# Altium PCB OFDMT1.PcbDoc (part 3 of 4)
Units mm, origin at the board's own origin, x right, y up, seen from the top; angles counter-clockwise.
Board outline 40.21 x 28.18 mm, 6 copper layers (Top Layer, GND1, SIGNAL, POWER, GND2, Bottom Layer), stack 1.436 mm thick; 295 components, 218 nets, 1362 pads, 709 vias.
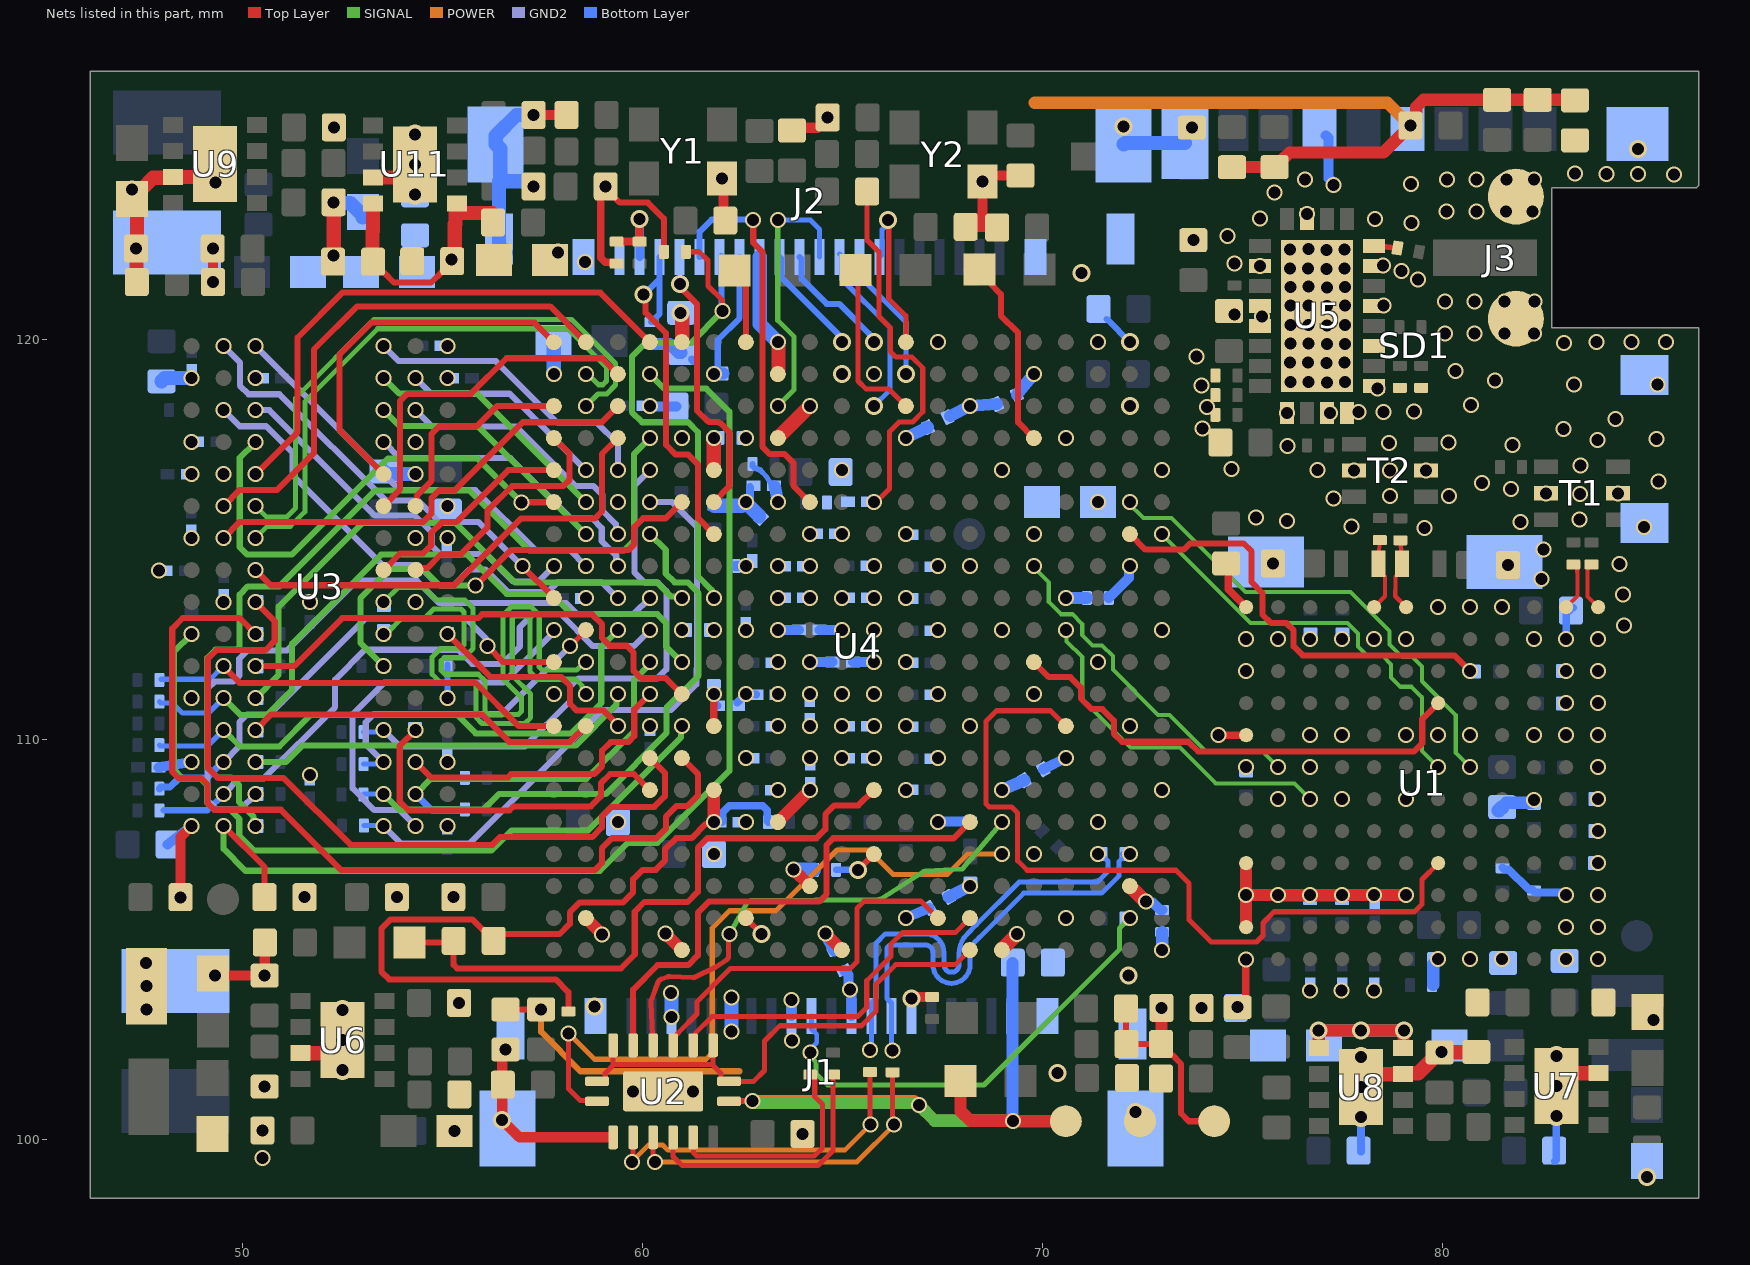
[diagram p6: the nets of this part, all layers, seen from the top]

## Via types
v1: diameter 0.4, hole 0.3, Top Layer to Bottom Layer, tented both sides, 609 vias
v2: diameter 0.45, hole 0.3, Top Layer to Bottom Layer, tented both sides, 85 vias
v3: diameter 0.5, hole 0.3, Top Layer to Bottom Layer, tented both sides, 13 vias
v4: diameter 0.5, hole 0.3, Top Layer to Bottom Layer, 2 vias

## Nets (pads, with @x,y where several pads share a name; then routed paths per layer and width w, separated by ;. In a path a pad name is that pad's centre, name@x,y a point inside that pad or via, vN(x,y) a via of type N, cw(c..) or ccw(c..) an arc to the next point about the centre after c; other vN are vias at no path point) (continued)
+1.8: C3.2 C4.1 C29.1 C34.1 C35.2 C41.1 C43.1 C70.1 C71.1 C72.1 C73.1 C74.1 C75.1 C76.1 C77.1 C83.1 C84.1 C85.1 C86.1 C87.1 FB1.1 FB5.1 R16.1 R25.1 R91.1 R92.1 TP2.1 U1.H12 U4.C19 U4.F8 U4.F11 U4.F18 U4.G9 U4.H8 U4.H14 U4.J9 U4.J11 U4.J17 U4.K8 U4.K20 U4.L11 U4.M8 U4.M16 U4.N9 U4.N11 U4.P10 U4.R9 U4.T8 U4.U11 U4.W7 U4.Y10 U8.4 U8.5 | length 34.8
  Top Layer w0.127: FB5.1@65.618,123.685 65.618,122.474 65.919,122.173 65.919,120.563 66.207,120.275 66.207,119.684 66.344,119.547 66.743,119.547 67.011,119.279 67.011,118.179 66.753,117.921 66.418,117.921 66.178,117.682 66.178,116.254 66.006,116.081 66,116.081 65.843,115.924 v1(65.787,115.924)
  Top Layer w0.152: C43.1@56.578,103.235 56.582,103.238 57.463,103.238 R25.1@57.468,103.243 ; v1(57.468,103.238) R25.1@57.468,103.243 ; R25.1@57.646,103.243 R25.1@57.468,103.243 ; U4.W7@62.587,105.524 v2(62.979,105.131) ; v2(65.392,106.731) U4.U11@65.787,107.124 ; R92.1@71.879,102.101 72.103,102.325 R92.1@72.103,102.375 ; R91.1@72.09,103.264 72.09,102.387 R92.1@72.103,102.375 ; R16.1@72.976,102.381 R16.1@72.97,102.375 ; TP2.1@74.295,100.444 73.664,100.444 73.467,100.642 73.467,101.877 73.243,102.101 73.193,102.101 72.97,102.325 R16.1@72.97,102.375 ; R92.1@72.103,102.375 R16.1@72.97,102.375
  Top Layer w0.191: v1(74.409,110.096) U1.H12@75.095,110.096
  Top Layer w0.305: U4.T8@63.387,107.924 v1(64.187,108.724) ; v1(64.58,105.137) 64.58,105.131 U4.Y10@64.987,104.724 U4.Y10@64.987,104.718 ; R16.1@72.976,102.381 72.976,103.27 v1(72.982,103.276) C4.1@72.982,103.273 ; U8.5@76.915,102.27 76.908,102.277 76.908,102.708 v2(76.902,102.715) v2(77.969,102.715) v2(79.036,102.715) 79.026,102.705 79.026,102.281 U8.4@79.015,102.27
  POWER w0.152: v1(57.468,103.238) 57.468,102.678 58.452,101.693 62.433,101.693
  Bottom Layer w0.127: 62.951,116.715 63.096,116.57 C71.1@63.243,116.327
  Bottom Layer w0.152: FB1.1@62.755,116.878 62.755,116.828 62.804,116.779 62.951,116.715 ; C71.1@63.243,116.327 C71.1@63.289,116.327 ; C29.1@64.842,106.731 v2(65.392,106.731) ; v1(70.587,113.524) v1@70.588,113.525
  Bottom Layer w0.254: v1@63.387,112.725 C85.1@63.919,112.725 ; C73.1@65.265,111.925 v1(65.787,111.924)
  Bottom Layer w0.305: C71.1@63.312,116.308 v1(63.387,115.924) ; v1(64.58,105.137) C34.1@64.806,104.719 ; v1@70.588,113.525 C41.1@71.112,113.525 ; v2(76.902,102.715) v2(77.969,102.715) v2(79.036,102.715) 79.04,102.711 v2@79.04,102.729
  other v1: 64.987,109.524 64.187,110.324 65.787,110.324 63.387,111.124 69.787,111.124 63.387,112.724 72.987,112.724 64.187,113.524 65.787,113.524 63.387,114.324 68.187,114.324 64.187,115.124 71.387,115.924
  other v2: 72.187,118.324
+3.3: C13.2 C32.1 C55.1 C56.1 C57.1 C58.1 C59.1 C60.1 C61.1 C62.1 C63.1 C104.2 C105.1 C106.1 C157.1 C158.1 C159.1 D5.2 FB6.1 J1.1 J2.7 R29.1 R33.1 R58.2 R59.2 R60.2 R61.2 R62.2 R65.2 R66.2 R73.1 R74.1 R85.2 R89.2 R90.2 R93.2 SD1.4 TP5.1 U2.16 U4.A13 U4.B6 U4.B10 U4.B16 U4.D7 U4.D12 U4.E15 U4.K6 U4.M6 U4.N6 U4.N19 U4.R6 U4.R15 U4.T6 U4.T18 U4.V14 U4.W17 U4.Y20 U11.4 U11.5 | length 79.9
  Top Layer w0.102: R65.2@59.36,121.886 59.41,121.886 R65.2@59.397,121.874
  Top Layer w0.152: C56.1@53.269,121.932 53.269,121.882 53.493,121.658 53.543,121.658 53.789,121.412 54.721,121.412 54.98,121.671 55.022,121.671 55.232,121.882 55.232,121.958 v2(55.232,121.983) ; R85.2@58.153,103.191 58.153,103.67 57.833,103.99 53.668,103.99 53.475,104.183 53.475,105.261 53.706,105.493 55.743,105.493 56.009,105.227 56.059,105.227 56.283,105.003 R93.2@56.283,104.953 56.455,105.125 57.931,105.125 58.187,105.381 58.187,105.667 58.428,105.908 59.514,105.908 59.771,106.165 59.771,106.493 60.007,106.729 60.336,106.729 60.571,106.964 60.571,107.252 60.844,107.524 61.232,107.524 61.585,107.877 61.74,107.877 v1(61.787,107.924) ; v1(59.085,123.812) 59.085,123.762 59.437,123.411 60.138,123.411 60.54,123.009 R73.1@60.54,122.18 ; U2.16@62.169,100.942 62.174,100.947 62.746,100.947 v1(62.751,100.952)
  Top Layer w0.191: v1(59.085,123.812) 58.96,123.687 58.96,122.033 59.077,121.916 59.33,121.916 R65.2@59.36,121.886 ; U4.N6@61.787,110.324 v1(61.787,111.124)
  Top Layer w0.305: v1(61.787,107.924) U4.R6@61.787,108.724 ; D5.2@67.956,101.448 67.956,100.7 68.201,100.455 v1(69.263,100.455) 69.274,100.444 TP5.1@70.587,100.444 ; U4.V14@68.187,106.324 v1(68.187,106.327) ; R61.2@74.741,124.294 74.745,124.298 R60.2@75.806,124.298 75.856,124.298 76.004,124.446 76.004,124.485 76.182,124.663 78.527,124.663 79.003,125.139 79.053,125.139 79.2,125.286 v1(79.2,125.336) ; R59.2@79.2,125.386 v1(79.2,125.336) ; C63.1@83.261,125.963 83.244,125.981 R58.2@81.369,125.981 79.527,125.981 79.348,125.802 79.348,125.484 v1(79.2,125.336)
  Top Layer w0.356: C56.1@53.256,122.238 53.256,122.687 53.264,122.695 U11.4@53.264,123.391 ; C62.1@55.232,121.958 C62.1@55.246,121.945 55.311,122.011 55.311,122.867 55.328,122.867 55.328,123.369 55.35,123.391 U11.5@55.364,123.391 ; 55.364,123.147 56.24,123.147 R29.1@56.274,123.114
  SIGNAL w0.305: v1(62.751,100.952) 62.776,100.952 62.826,100.903 66.838,100.903 66.891,100.851 v1(66.916,100.851) 67.312,100.455 v1(69.263,100.455)
  POWER w0.305: v1(62.751,100.952) 66.789,100.952 66.891,100.851 v1(66.916,100.851) 67.312,100.455 v1(69.263,100.455) ; 69.812,125.908 78.629,125.908 v1(79.2,125.336)
  Bottom Layer w0.152: C55.1@61.239,119.516 61.213,119.49 C55.1@61.264,119.429 ; v1@61.809,119.146 61.809,119.213 61.885,119.29 61.885,119.975 62.434,120.524 J2.7@62.434,122.047
  Bottom Layer w0.191: v1(61.787,111.124) 61.827,111.084 61.827,110.865 61.863,110.829 C106.1@61.887,110.829 ; C105.1@61.833,107.971 v1(61.787,107.924) 62.001,107.924 C105.1@62.001,107.955 ; C105.1@61.925,107.925 C105.1@61.971,107.925 ; C105.1@62.007,107.961 62.007,108.163 62.171,108.327 63.012,108.327 63.123,108.216 63.123,107.945 R89.2@63.144,107.924
  Bottom Layer w0.305: R74.1@60.223,119.871 60.685,119.871 60.901,119.655 C55.1@60.973,119.655 ; v1(61.787,119.124) v1@61.793,119.13 ; v1@61.799,119.136 R66.2@62.025,119.136 ; v1(66.587,117.524) C59.1@67.141,117.795 ; C158.1@67.659,106.053 v1(68.187,106.327) ; v1(68.987,108.724) C159.1@69.548,108.968 ; C57.1@69.257,104.403 69.257,103.504 69.255,103.502 69.255,103.104 69.257,103.106 69.257,100.461 v1(69.263,100.455) ; C60.1@69.363,118.607 v1(69.787,119.124) ; v1@72.996,104.734 C157.1@72.996,105.173
  other v1: 72.987,104.724 70.587,105.524 71.387,107.924 72.187,110.324 61.787,112.724 68.987,116.724 62.587,117.524 67.387,119.924
  other v2: 64.987,119.124
AD9361_RESET: R7.1 U1.K5 U4.G19 | length 11
  Top Layer w0.152: U4.G19@72.196,115.115 72.578,114.733 73.54,114.733 73.698,114.892 75.029,114.892 75.232,114.689 75.232,113.922 75.503,113.65 75.503,113.113 75.72,112.896 76.101,112.896 76.282,112.715 76.282,112.317 76.51,112.089 80.303,112.089 v1(80.695,111.696)
AD9361_RX1A_N: C10.2 U1.M2 | length 1.2
  Top Layer w0.102: U1.M2@83.095,113.296 83.374,113.575 83.374,114.179 83.373,114.239 C10.2@83.274,114.338
AD9361_RX1A_P: C9.2 U1.M1 | length 1.2
  Top Layer w0.102: C9.2@83.731,114.338 83.632,114.239 83.632,114.184 83.628,114.179 83.628,113.564 U1.M1@83.895,113.296
AD9361_TX1A_N: C23.2 L4.2 U1.M8 | length 1.9
  Top Layer w0.104: U1.M8@78.295,113.296 78.567,113.568 78.567,113.816 78.57,113.819 78.57,114.066 78.406,114.23 L4.2@78.406,114.383 78.411,114.469 78.421,114.661 78.421,114.663 78.433,114.895 78.433,114.897 C23.2@78.436,114.97
AD9361_TX1A_P: C24.2 L1.2 U1.M7 | length 1.9
  Top Layer w0.104: C24.2@78.954,114.969 78.959,114.896 78.959,114.893 78.973,114.664 78.973,114.661 78.984,114.476 L1.2@78.99,114.383 78.99,114.23 78.826,114.066 78.826,113.713 78.823,113.71 78.823,113.568 U1.M7@79.095,113.296
ANT: C33.2 U5.12 | length 0.6
  Top Layer w0.14: U5.12@78.294,122.328 78.499,122.308 U5.12@78.515,122.308 ; C33.2@78.822,122.28 C33.2@78.877,122.275
  Top Layer w0.152: U5.12@78.515,122.308 C33.2@78.822,122.28
bootmode: J2.2 R37.2 R65.1 | length 2.1
  Top Layer w0.203: R65.1@59.36,122.436 59.927,122.436 R37.2@59.931,122.432 v2(59.931,122.999)
  Bottom Layer w0.203: v2(59.931,122.999) 59.934,122.997 J2.2@59.934,122.047
CLK_IN_9361: C146.2 U1.M12 | length 1.2
  Top Layer w0.191: C146.2@74.652,114.325 74.652,113.74 U1.M12@75.095,113.296
CLK_OUT_9361: U1.J6 U4.L16 | length 12.2
  Top Layer w0.152: U4.L16@69.787,111.924 70.165,111.546 70.699,111.546 70.965,111.281 70.965,111.012 71.23,110.746 71.499,110.746 71.789,110.457 71.789,110.133 71.992,109.93 73.651,109.93 73.892,109.69 79.294,109.69 79.498,109.894 79.498,110.499 U1.J6@79.895,110.896
CTRL_IN2: U1.D6 U4.N17 | length 19.7
  Top Layer w0.127: U4.N17@70.587,110.324 70.204,110.707 68.853,110.707 68.593,110.447 68.593,108.378 68.668,108.304 69.231,108.304 69.384,108.151 69.384,106.955 69.621,106.718 73.34,106.718 73.671,106.387 73.671,105.475 74.221,104.925 75.355,104.925 75.516,105.086 75.516,105.402 75.794,105.681 79.303,105.681 79.489,105.866 79.489,106.49 U1.D6@79.895,106.896
DATA_CLK_P: U1.G11 U4.H16 | length 8.9
  SIGNAL w0.102: v1(69.787,114.324) 69.787,114.282 70.161,113.908 70.161,113.429 70.47,113.119 70.757,113.119 70.997,112.878 70.997,112.6 71.259,112.339 71.495,112.339 71.762,112.072 71.762,111.737 72.895,110.604 73.177,110.604 74.092,109.69 75.502,109.69 v1(75.895,109.296)
DDR_A0: R21.1 U3.N3 U4.N2 | length 8.9
  Top Layer w0.152: v1(50.33,110.224) 50.723,110.617 55.981,110.617 56.671,109.927 58.19,109.927 U4.N2@58.587,110.324
DDR_A1: R79.1 U3.P7 U4.K2 | length 8.2
  Top Layer w0.127: v1(58.192,112.319) 58.587,112.714 U4.K2@58.587,112.724
  GND2 w0.152: v1(53.53,109.424) 53.086,109.869 53.086,110.42 53.284,110.618 56.491,110.618 v1(58.192,112.319)
  Bottom Layer w0.127: R79.1@53.032,109.371 53.403,109.371 53.457,109.424 v1(53.53,109.424)
DDR_A2: R41.1 U3.P3 U4.M3 | length 9.9
  SIGNAL w0.152: v1(50.33,109.424) 51.091,109.424 51.501,109.834 58.33,109.834 59.352,110.857 59.352,111.09 v1(59.387,111.124)
DDR_A3: R45.1 U3.N2 U4.K3 | length 14.2
  SIGNAL w0.152: v1(49.531,110.224) 49.942,109.813 50.926,109.813 51.715,110.602 55.37,110.602 55.831,110.141 58.219,110.141 58.974,110.896 58.974,112.306 v1@59.38,112.713
  Bottom Layer w0.127: R45.1@47.925,109.845 47.946,109.824 49.131,109.824 v1(49.531,110.224)
  other v1: 59.387,112.724
DDR_A4: R48.1 U3.P8 U4.M4 | length 8.9
  Top Layer w0.152: v1(54.33,109.424) 54.713,109.042 56.642,109.042 56.723,109.123 58.795,109.123 58.996,109.324 58.996,109.712 59.208,109.924 59.647,109.924 59.798,110.075 59.798,110.735 v1(60.187,111.124)
  Bottom Layer w0.127: v1(54.33,109.424) 54.725,109.029 R48.1@55.562,109.029
DDR_A5: R52.1 U3.P2 U4.L1 | length 12.5
  Top Layer w0.152: v1(56.134,112.319) 56.134,112.315 56.524,111.924 U4.L1@57.787,111.924
  GND2 w0.152: v1(49.531,109.424) 49.924,109.818 49.924,110.423 50.117,110.616 50.686,110.616 53.083,113.013 55.588,113.013 56.086,112.515 56.086,112.366 v1(56.134,112.319)
  Bottom Layer w0.178: R52.1@47.925,108.757 47.925,108.76 47.962,108.796 48.189,108.796 48.413,109.02 49.103,109.02 49.508,109.424 v1(49.531,109.424)
DDR_A6: R55.1 U3.R8 U4.L4 | length 9.4
  SIGNAL w0.152: v1(54.33,108.624) 54.708,109.002 58.599,109.002 59.792,110.195 59.792,111.469 60.187,111.864 v1(60.187,111.924)
  Bottom Layer w0.178: v1(54.33,108.624) 54.732,108.222 55.543,108.222 R55.1@55.562,108.242
DDR_A7: R31.1 U3.R2 U4.K4 | length 15.7
  GND2 w0.152: v1(49.531,108.624) 49.924,109.017 50.54,109.017 52.318,110.795 52.318,111.483 53.066,112.231 55.393,112.231 55.746,111.878 56.501,111.878 56.934,112.312 56.934,112.789 57.272,113.127 57.954,113.127 58.751,112.33 59.793,112.33 v1(60.187,112.724)
  Bottom Layer w0.152: R31.1@48.035,108.219 49.126,108.219 v1(49.531,108.624)
DDR_A8: R38.1 U3.T8 U4.K1 | length 9.8
  GND2 w0.152: v1(54.331,107.824) 53.934,108.221 53.302,108.221 52.756,108.767 52.756,110.62 53.544,111.408 56.525,111.408 57.787,112.67 v1(57.787,112.724)
DDR_A9: R42.1 U3.R3 U4.J4 | length 17.2
  GND2 w0.152: v1(50.33,108.624) 49.946,108.24 49.353,108.24 49.127,108.466 49.127,109.824 49.127,111.251 49.31,111.435 49.773,111.435 49.922,111.583 49.922,112.006 50.125,112.209 51.11,112.209 52.859,113.958 54.364,113.958 54.926,113.396 58.092,113.396 58.361,113.127 59.79,113.127 v1(60.187,113.524)
DDR_A10: R46.1 U3.L7 U4.F5 | length 11.6
  Top Layer w0.152: v1(55.834,113.833) 56.727,114.726 59.657,114.726 59.795,114.864 59.795,115.296 60.019,115.52 60.582,115.52 U4.F5@60.987,115.924
  SIGNAL w0.152: v1(53.53,111.824) 52.951,112.403 52.951,113.518 53.681,114.247 54.519,114.247 54.932,113.833 v1(55.834,113.833)
DDR_A11: R49.1 U3.R7 U4.G4 | length 14.5
  SIGNAL w0.152: v1(53.53,108.624) 53.924,108.231 56.021,108.231 56.413,108.623 59.08,108.623 60.603,110.145 60.603,110.779 61.407,111.584 61.407,113.643 61.136,113.913 60.808,113.913 60.585,114.136 60.585,114.726 v1(60.187,115.124)
  Bottom Layer w0.127: R49.1@53.031,108.61 53.045,108.624 v1(53.53,108.624)
DDR_A12: R53.1 U3.N7 U4.E4 | length 14.4
  GND2 w0.152: v1(53.53,110.224) 53.938,109.816 57.061,109.816 58.191,110.947 58.191,111.305 58.404,111.517 60.372,111.517 60.6,111.745 60.6,113.694 60.386,113.908 60.057,113.908 59.799,114.166 59.799,116.337 v1(60.187,116.724)
  Bottom Layer w0.127: R53.1@53.032,110.171 53.403,110.171 53.457,110.224 v1(53.53,110.224)
DDR_A13: R56.1 U3.T3 U4.D4 | length 21.5
  SIGNAL w0.152: v1(50.33,107.824) 50.283,107.871 50.283,108.059 49.912,108.431 49.912,108.853 49.727,109.037 49.383,109.037 49.123,109.297 49.123,112.025 49.331,112.233 49.859,112.233 49.933,112.308 49.933,113.609 50.139,113.815 50.927,113.815 53.327,116.215 55.667,116.215 57.167,114.715 59.544,114.715 59.787,114.958 59.787,117.124 v1(60.187,117.524)
DDR_A14: R35.1 U3.T7 U4.F4 | length 15.5
  GND2 w0.152: v1(53.53,107.824) 53.969,107.386 55.667,107.386 59.011,110.73 60.717,110.73 61.354,111.366 61.354,111.757 61.365,111.768 61.365,115.305 60.745,115.924 v1(60.187,115.924)
  Bottom Layer w0.127: R35.1@53.039,107.836 53.519,107.836 v1(53.53,107.824)
DDR_BA0: R39.1 U3.M2 U4.L5 | length 17.3
  SIGNAL w0.152: v1(49.531,111.024) 49.95,110.604 50.618,110.604 51.244,111.231 51.244,112.382 53.47,114.608 55.626,114.608 56.609,113.626 57.736,113.626 58.241,113.121 60.374,113.121 60.588,112.906 60.588,112.323 v1(60.987,111.924)
  Bottom Layer w0.127: R39.1@47.925,110.933 47.957,110.901 48.248,110.901 48.501,110.648 49.155,110.648 v1(49.531,111.024)
DDR_BA1: R43.1 U3.N8 U4.R4 | length 9
  Top Layer w0.152: v1(54.33,110.224) 53.934,109.828 53.934,108.436 54.158,108.213 56.676,108.213 56.78,108.317 58.714,108.317 58.965,108.568 58.965,108.897 59.193,109.125 59.786,109.125 U4.R4@60.187,108.724
DDR_BA2: R47.1 U3.M3 U4.J5 | length 14.2
  SIGNAL w0.152: v1(50.33,111.024) 50.909,111.602 50.909,112.22 50.909,113.306 53.01,115.407 55.323,115.407 56.819,113.911 60.37,113.911 60.723,113.558 60.953,113.558 v1(60.987,113.524)
DDR_CAS: R36.1 U3.K3 U4.P5 | length 22.6
  Top Layer w0.152: v1(50.33,112.624) 49.93,113.025 48.511,113.025 48.247,112.761 48.247,109.185 48.413,109.019 48.971,109.019 49.131,108.859 49.131,108.394 49.295,108.23 50.964,108.23 52.474,106.72 58.807,106.72 58.987,106.9 58.987,107.267 59.238,107.518 60.345,107.518 60.587,107.76 60.587,108.058 60.85,108.322 61.119,108.322 61.396,108.599 61.396,109.115 U4.P5@60.996,109.515
DDR_CKE: R44.1 U3.K9 U4.N3 | length 5.5
  Top Layer w0.152: v1(55.13,112.624) 56.209,111.546 57.974,111.546 58.191,111.328 58.191,110.876 58.358,110.709 59.036,110.709 59.387,110.358 v1(59.387,110.324)
DDR_CKN: R51.2 U3.K7 U4.M2 | length 14.2
  SIGNAL w0.127: v1(53.53,112.624) 53.594,112.624 54.001,113.031 54.567,113.031 54.785,113.249 55.466,113.249 55.54,113.174 55.54,112.353 55.446,112.259 54.953,112.259 54.745,112.051 54.745,111.617 54.973,111.389 55.806,111.389 55.837,111.358 55.837,110.546 55.994,110.388 57.064,110.388 57.209,110.533 57.209,111.123 56.748,111.583 56.748,113.004 56.823,113.078 57.119,113.078 57.193,113.004 57.193,111.683 57.383,111.493 58.334,111.493 58.496,111.331 58.496,111.289 58.587,111.198 v1(58.587,111.124)
DDR_CKP: R51.1 U3.J7 U4.L2 | length 14
  SIGNAL w0.127: v1@53.538,113.431 53.896,113.789 54.536,113.789 54.848,113.477 55.56,113.477 55.769,113.269 55.769,112.259 55.54,112.03 55.048,112.03 54.974,111.956 54.974,111.712 55.068,111.618 55.9,111.618 56.065,111.453 56.065,110.691 56.14,110.617 56.906,110.617 56.98,110.691 56.98,111.028 56.52,111.489 56.52,113.099 56.728,113.307 57.217,113.307 57.422,113.102 57.422,111.796 57.496,111.722 58.352,111.722 58.555,111.924 v1(58.587,111.924)
  other v1: 53.53,113.424
DDR_CS: R54.1 U3.L2 U4.N1 | length 10.6
  Top Layer w0.152: v1(49.531,111.824) 49.531,111.807 49.933,111.404 55.829,111.404 56.909,110.324 U4.N1@57.787,110.324
  Bottom Layer w0.127: R54.1@47.968,111.493 49.2,111.493 v1(49.531,111.824)
DDR_DM0: U3.E7 U4.A1 | length 9.3
  Top Layer w0.152: U3.E7@53.53,116.624 52.426,117.729 52.426,119.609 53.226,120.409 57.302,120.409 U4.A1@57.787,119.924
DDR_DM1: U3.D3 U4.F1 | length 12.1
  Top Layer w0.152: v1(56.974,115.918) 57.781,115.918 U4.F1@57.787,115.924
  SIGNAL w0.152: v1@50.305,117.399 49.936,117.03 49.936,114.796 50.114,114.617 51.244,114.617 53.637,117.01 55.882,117.01 v1(56.974,115.918)
  other v1: 50.33,117.424
DDR_DQ0: U3.E3 U4.A4 | length 13.6
  Top Layer w0.152: v1(50.33,116.624) 51.38,117.673 51.38,120.037 52.5,121.158 58.953,121.158 U4.A4@60.187,119.924
DDR_DQ1: U3.F7 U4.B3 | length 8.8
  Top Layer w0.152: U3.F7@53.53,115.824 53.94,116.234 53.94,118.439 54.127,118.626 55.711,118.626 56.604,119.52 58.991,119.52 U4.B3@59.387,119.124
DDR_DQ2: U3.F2 U4.A2 | length 13
  Top Layer w0.152: v1(49.531,115.824) 49.933,116.226 50.868,116.226 51.791,117.149 51.791,119.737 52.868,120.815 57.696,120.815 U4.A2@58.587,119.924
DDR_DQ3: U3.F8 U4.C1 | length 5.3
  Top Layer w0.152: U3.F8@54.33,115.824 54.367,115.861 54.367,116.089 54.724,116.446 54.724,117.62 54.927,117.823 55.863,117.823 56.364,118.324 U4.C1@57.787,118.324
DDR_DQ4: U3.H3 U4.D3 | length 11.6
  Top Layer w0.152: v1(50.33,114.224) 50.712,113.843 55.296,113.843 56.965,115.512 58.815,115.512 58.991,115.688 58.991,117.129 U4.D3@59.387,117.524
DDR_DQ5: U3.H8 U4.D1 | length 6.2
  Top Layer w0.152: U3.H8@54.33,114.224 54.378,114.271 54.621,114.271 54.966,114.616 55.46,114.616 56.127,115.283 56.127,115.71 56.742,116.325 58.025,116.325 58.18,116.481 58.18,117.131 U4.D1@57.787,117.524
DDR_DQ6: U3.G2 U4.C3 | length 11.4
  Top Layer w0.152: v1(49.531,115.024) 49.927,115.421 54.511,115.421 54.734,115.643 54.734,116.026 54.927,116.219 55.31,116.219 57.01,117.919 58.982,117.919 U4.C3@59.387,118.324
DDR_DQ7: U3.H7 U4.E1 | length 5.5
  Top Layer w0.152: U3.H7@53.53,114.224 53.944,114.638 54.515,114.638 54.723,114.846 54.723,115.151 54.996,115.424 55.343,115.424 56.643,116.724 U4.E1@57.787,116.724
DDR_DQ8: U3.B8 U4.E2 | length 5.2
  GND2 w0.152: v1(54.33,119.024) 54.724,118.631 56.68,118.631 v1(58.587,116.724)
DDR_DQ9: U3.A7 U4.E3 | length 7.5
  GND2 w0.152: v1(53.53,119.824) 53.909,119.445 56.34,119.445 57.876,117.909 58.865,117.909 59.387,117.388 v1(59.387,116.724)
DDR_DQ10: U3.C8 U4.G3 | length 6.7
  GND2 w0.152: v1(54.33,118.224) 54.744,117.811 56.851,117.811 58.338,116.324 58.782,116.324 58.998,116.107 58.998,115.712 59.337,115.373 59.337,115.174 v1(59.387,115.124)
DDR_DQ11: U3.D7 U4.H3 | length 7.5
  GND2 w0.152: v1@53.532,117.426 53.937,117.021 56.704,117.021 58.211,115.515 58.744,115.515 58.985,115.274 58.985,114.947 59.348,114.584 59.348,114.363 v1(59.387,114.324)
  other v1: 53.53,117.424
DDR_DQ12: U3.C2 U4.J3 | length 12.6
  GND2 w0.152: v1(49.531,118.224) 49.936,117.818 50.596,117.818 51.257,117.157 51.257,116.595 53.501,114.351 54.388,114.351 54.892,113.846 55.296,113.846 55.69,114.24 56.078,114.24 56.639,113.679 57.64,113.679 57.872,113.911 58.995,113.911 v1@59.382,113.524
  other v1: 59.387,113.524
DDR_DQ13: U3.A3 U4.H2 | length 10.5
  GND2 w0.152: v1(50.33,119.824) 53.93,116.224 55.823,116.224 57.32,114.727 58.184,114.727 v1(58.587,114.324)
DDR_DQ14: U3.C3 U4.H1 | length 9.6
  GND2 w0.152: v1(50.33,118.224) 50.673,118.224 53.314,115.584 54.317,115.584 54.734,115.166 54.734,114.83 54.939,114.626 56.083,114.626 56.776,113.933 57.396,113.933 v1(57.787,114.324)
DDR_DQ15: U3.A2 U4.J1 | length 11.2
  Top Layer w0.152: v1(57.001,114.324) U4.J1@57.787,113.539
  GND2 w0.152: v1(49.531,119.824) 49.938,119.417 49.938,118.837 50.157,118.618 50.927,118.618 53.581,115.964 54.386,115.964 54.929,115.421 55.905,115.421 v1(57.001,114.324)
DDR_DQS0_N: U3.G3 U4.B2 | length 14
  SIGNAL w0.127: v1(50.33,115.024) 50.623,115.317 51.2,115.317 51.562,115.679 51.562,118.434 53.384,120.256 58.137,120.256 59.102,119.292 59.102,118.948 59.01,118.856 58.905,118.856 58.637,119.124 v1(58.587,119.124)
DDR_DQS0_P: U3.F3 U4.C2 | length 14.7
  SIGNAL w0.127: v1(50.33,115.824) 50.609,115.546 51.105,115.546 51.333,115.774 51.333,118.529 53.289,120.485 58.232,120.485 59.33,119.386 59.33,118.848 59.11,118.628 58.89,118.628 v1(58.587,118.324)
DDR_DQS1_N: U3.B7 U4.F2 | length 6.3
  SIGNAL w0.152: v1(53.53,119.024) 53.92,118.635 55.877,118.635 v1(58.587,115.924)
DDR_DQS1_P: U3.C7 U4.G2 | length 6.3
  SIGNAL w0.152: v1(53.53,118.224) 53.932,117.823 55.888,117.823 v1(58.587,115.124)
DDR_ODT: R50.1 U3.K1 U4.N5 | length 19
  SIGNAL w0.152: v1(48.73,112.624) 48.285,112.179 48.285,109.239 48.503,109.021 48.945,109.021 49.116,108.85 49.116,108.423 49.308,108.231 49.694,108.231 49.922,108.002 49.922,107.582 50.291,107.213 56.231,107.213 56.727,107.709 58.636,107.709 60.97,110.043 60.97,110.271 v1@60.985,110.287
  other v1: 60.987,110.324
DDR_RAS: R57.1 U3.J3 U4.P4 | length 19.7
  Top Layer w0.152: v1(50.33,113.424) 50.81,112.944 50.81,112.455 50.579,112.224 49.354,112.224 49.135,112.006 49.135,109.285 49.396,109.024 51.034,109.024 52.705,107.353 56.248,107.353 56.441,107.546 58.743,107.546 58.987,107.79 58.987,108.058 59.23,108.302 60.299,108.302 60.565,108.568 60.565,109.153 U4.P4@60.206,109.512
DDR_RESET: R76.2 U3.T2 U4.B4 | length 28
  Top Layer w0.152: v1(49.531,107.824) 50.554,106.801 R76.2@50.554,106.045
  SIGNAL w0.152: v1(49.531,107.824) 49.531,107.253 50.077,106.707 58.942,106.707 59.639,107.404 60.376,107.404 62.177,109.205 62.177,118.182 61.6,118.759 60.552,118.759 v1(60.187,119.124)
DDR_WE: R40.1 U3.L3 U4.M5 | length 12.5
  Top Layer w0.152: v1(50.33,111.824) 51.296,111.824 52.496,113.024 55.898,113.024 55.993,113.119 58.741,113.119 58.994,112.866 58.994,112.521 59.184,112.331 59.611,112.331 59.782,112.16 59.782,111.704 59.966,111.52 60.591,111.52 U4.M5@60.987,111.124
EN_AGC: U1.G5 U4.F19 | length 12.3
  SIGNAL w0.102: v1@72.118,115.93 72.526,115.522 73.225,115.522 75.074,113.674 77.701,113.674 78.68,112.695 78.68,112.362 78.981,112.062 79.244,112.062 79.49,111.816 79.49,111.444 80.335,110.6 80.335,109.657 v1(80.695,109.296)
  other v1: 72.187,115.924
EN_ENSM: U1.G6 U4.G20 | length 10.5
  SIGNAL w0.102: v1@73,115.1 75.204,112.895 77.633,112.895 77.886,112.642 77.886,112.317 78.119,112.084 78.499,112.084 78.721,111.863 78.721,111.538 78.953,111.306 79.227,111.306 79.489,111.043 79.489,109.702 v1(79.895,109.296)
  other v1: 72.987,115.124
FB_CLK_P: U1.F10 U4.K17 | length 8.6
  SIGNAL w0.102: v1(70.587,112.724) 70.601,112.71 70.601,112.443 70.998,112.045 70.998,110.989 72.199,109.788 73.437,109.788 74.336,108.89 76.302,108.89 v1(76.695,108.496)
FPGA_DIR: U2.1 U2.2 U2.7 U2.8 U4.Y14 | length 13
  Top Layer w0.127: U2.8@58.869,101.442 59.015,101.442 59.072,101.499 59.072,101.645 59.269,101.842 U2.7@59.269,102.342 ; 59.269,101.859 61.752,101.859 61.769,101.842 ; U2.2@61.769,102.342 61.769,101.842 ; U4.Y14@68.187,104.724 67.822,104.359 66.334,104.359 65.838,103.863 65.838,103.191 65.479,102.832 63.436,102.832 63.055,102.451 63.055,101.714 62.784,101.442 U2.1@62.169,101.442 62.023,101.442 61.966,101.499 61.966,101.645 61.769,101.842
FPGA_DONE: D1.2 R93.1 U4.R11 | length 15.6
  Top Layer w0.152: D1.2@54.18,104.915 55.245,104.915 R93.1@55.283,104.953 55.283,104.351 55.372,104.262 59.459,104.262 59.809,104.612 59.809,105.681 60.053,105.925 61.132,105.925 61.387,106.18 61.387,107.278 61.628,107.519 64.352,107.519 64.575,107.742 64.575,108.115 64.801,108.341 65.403,108.341 U4.R11@65.787,108.724
FPGA_JTAG_TCK: J2.5 U4.F9 | length 10
  Top Layer w0.152: v1(62.772,122.974) 62.772,122.409 63,122.181 63,117.309 63.185,117.124 63.558,117.124 63.778,116.904 63.778,116.333 U4.F9@64.187,115.924
  Bottom Layer w0.152: J2.5@61.468,122.082 J2.5@61.434,122.047 61.434,122.686 61.735,122.987 62.759,122.987 v1(62.772,122.974)
FPGA_JTAG_TDI: J2.3 R74.2 U4.G6 | length 9.2
  Top Layer w0.152: v2(60.033,121.107) 60.08,121.06 60.08,120.654 60.591,120.143 60.591,117.351 60.835,117.108 61.145,117.108 61.394,116.859 61.394,115.517 U4.G6@61.778,115.133
  Bottom Layer w0.152: v2(60.033,121.107) 60.434,121.508 ; R74.2@60.223,120.421 60.273,120.421 60.322,120.47 60.322,120.52 60.434,120.632 60.434,121.508 ; J2.3@60.434,122.047 60.434,121.508
FPGA_JTAG_TDO: J2.4 U4.F6 | length 6.3
  Top Layer w0.152: v2(60.937,121.374) 60.937,121.302 61.362,120.878 61.362,120.084 61.365,120.081 61.365,118.968 61.365,118.212 61.63,117.946 61.648,117.946 61.671,117.924 61.903,117.924 61.925,117.902 61.943,117.902 62.178,117.667 62.178,116.316 U4.F6@61.787,115.924
FPGA_JTAG_TMS: J2.6 R73.2 U4.J6 | length 13.7
  Top Layer w0.127: R73.2@61.09,122.18 61.421,122.18 61.641,121.96 61.641,121.327 61.989,120.98 61.989,120.71 v1(62.003,120.696)
  SIGNAL w0.152: v1(61.787,113.524) 61.74,113.572 61.74,113.722 61.387,114.075 61.387,117.675 61.143,117.919 59.992,117.919 59.741,118.171 59.741,119.561 60.078,119.898 61.206,119.898 v1(62.003,120.696)
  Bottom Layer w0.152: J2.6@61.966,122.079 61.976,122.069 61.976,120.723 v1(62.003,120.696)
FPGA_MIPI_CLK_LP_N: U2.5 U4.T15 | length 12.2
  Top Layer w0.127: 60.212,103.415 60.256,102.582 60.256,102.579 U2.5@60.269,102.342 ; 60.212,103.416 cw(c60.339,103.421) 60.22,103.466 60.393,103.92 ; 60.393,103.92 cw(c60.512,103.875) 60.469,103.994 60.645,104.056 cw(c60.687,103.936) 60.692,104.063 61.259,104.04 ; 61.26,104.04 ccw(c61.264,104.167) 61.318,104.052 61.816,104.289 ; 61.817,104.289 ccw(c61.761,104.403) 61.83,104.297 62.101,104.474 ; 62.101,104.474 ccw(c62.031,104.58) 62.158,104.572 62.158,105.106 v1(62.181,105.129)
  SIGNAL w0.127: v1(62.181,105.129) 62.613,105.892 cw(c62.723,105.83) 62.722,105.957 65.902,105.981 ; 65.903,105.981 ccw(c65.901,106.108) 65.969,106.001 67.016,106.675 ; 67.016,106.675 cw(c67.084,106.568) 67.077,106.695 67.998,106.753 v1(68.987,107.924)
FPGA_MIPI_CLK_LP_P: U2.6 U4.T14 | length 12.9
  Top Layer w0.152: U2.6@59.769,102.342 59.769,103.736 60.379,104.346 61.143,104.346 61.387,104.59 61.387,105.658 61.663,105.934 64.418,105.934 64.605,106.121 64.605,107.353 64.77,107.518 67.781,107.518 U4.T14@68.187,107.924
FPGA_MIPI_D0_LP_N: U2.4 U4.W13 | length 9.3
  Top Layer w0.127: U2.4@60.769,102.342 cw(c61.214,102.342) 60.899,102.657 61.366,103.124 61.366,103.429 62.205,104.267 65.202,104.267 65.367,104.432 65.367,105.766 65.545,105.943 66.968,105.943 U4.W13@67.387,105.524
FPGA_MIPI_D0_LP_P: U2.3 U4.W14 | length 8.9
  Top Layer w0.127: U2.3@61.269,102.342 61.326,102.399 61.326,102.641 61.745,103.061 65.385,103.061 65.61,103.285 65.61,103.958 66.212,104.561 66.212,104.866 66.505,105.159 67.822,105.159 U4.W14@68.18,105.517
FPGA_OE: R85.1 U2.9 U4.U15 | length 17.8
  Top Layer w0.127: v1(58.153,102.641) 58.153,101.257 58.445,100.965 58.846,100.965 U2.9@58.869,100.942
  POWER w0.127: v1(58.153,102.641) 58.801,101.994 61.594,101.994 61.747,102.148 61.747,105.272 62.182,105.706 63.344,105.706 64.864,107.226 65.659,107.226 66.269,106.617 67.627,106.617 68.135,107.124 v1(68.987,107.124)
GND: C1.2 C2.2 C3.1 C4.2 C5.1 C6.2 C7.1 C8.1 C11.1 C12.2 C13.1 C14.1 C15.1 C16.2 C17.1 C18.2 C20.1 C21.2 C22.2 C25.2 C26.2 C27.1 C28.1 C29.2 C30.1 C31.1 C32.2 C34.2 C35.1 C36.2 C37.2 C38.2 C39.2 C40.2 C41.2 C42.2 C43.2 C44.2 C45.2 C46.2 C47.2 C48.2 C49.2 C50.2 C51.2 C52.2 C53.2 C54.1 C55.2 C56.2 C57.2 C58.2 C59.2 C60.2 C61.2 C62.2 C63.2 C64.2 C65.2 C66.2 C67.2 C68.2 C69.2 C70.2 C71.2 C72.2 C73.2 C74.2 C75.2 C76.2 C77.2 C78.2 C79.2 C80.2 C81.2 C82.2 C83.2 C84.2 C85.2 C86.2 C87.2 C88.1 C89.2 C90.2 C91.2 C92.2 C93.2 C94.2 C95.2 C96.2 C97.2 C98.2 C99.2 C100.1 C101.1 C102.1 C103.1 C104.1 C105.2 C106.2 C109.2 C110.1 C111.2 C112.1 C113.2 C114.1 C115.2 C116.1 C117.2 C118.2 C119.1 C120.2 C121.1 C122.2 C123.1 C124.2 C125.1 C126.2 C127.2 C128.2 C130.2 C131.2 C132.2 C133.2 C134.2 C135.2 C136.2 C137.2 C138.2 C139.2 C140.2 C141.1 C142.1 C143.2 C144.1 C145.1 C147.2 C148.1 C149.2 C150.1 C151.2 C152.2 C153.1 C154.1 C155.1 C156.1 C157.2 C158.2 C159.2 J1.6 J1.9 J1.12 J1.15 J1.18 J1.MP1 J1.MP2 J1.MP3 J1.MP4 J1.MP5 J1.MP6 J2.1 J2.8 J2.MP1 J2.MP2 J2.MP3 J2.MP4 J2.MP5 J2.MP6 J3.2 J3.3 pwr-1.1 R4.2 R6.1 R8.1 R9.2 R12.2 R15.2 R18.2 R22.2 R26.2 R27.1 R28.2 R34.1 R63.1 R64.1 R67.2 R70.2 R71.1 R76.1 R77.1 R82.1 R87.1 R94.1 R95.1 SD1.6 SD1.9 SD1.10 SD1.11 SD1.12 SD1.13 SD1.14 T1.2 T1.5 T2.2 T2.5 TP6.1 U1.A1 U1.A2 U1.A4 U1.A5 U1.A6 U1.A12 U1.B1 U1.B2 U1.B12 U1.C1 U1.C2 U1.C7 U1.C8 U1.C9 U1.C10 U1.C11 U1.C12 U1.D1 U1.D12 U1.E1 U1.F1 U1.F3 U1.F7 U1.F9 U1.F11 U1.G1 U1.G10 U1.G12 U1.H1 U1.H2 U1.H3 U1.H5 U1.H6 U1.H7 U1.H9 U1.H10 U1.J1 U1.J2 U1.K1 U1.K2 U1.K12 U1.L1 U1.L2 U1.L3 U1.L7 U1.L8 U1.L9 U1.L10 U1.L11 U1.L12 U1.M4 U1.M5 U1.M6 U2.10 U2.17 U3.A9 U3.B1 U3.B3 U3.B9 U3.D1 U3.D8 U3.E1 U3.E2 U3.E8 U3.F9 U3.G1 U3.G8 U3.G9 U3.J2 U3.J8 U3.M1 U3.M9 U3.P1 U3.P9 U3.T1 U3.T9 U4.A5 U4.A8 U4.A18 U4.B1 U4.B8 U4.B11 U4.C4 U4.C9 U4.C14 U4.D5 U4.D6 U4.D8 U4.D17 U4.E6 U4.E10 U4.E20 U4.F3 U4.F7 U4.G10 U4.G12 U4.G16 U4.H7 U4.H9 U4.H11 U4.H13 U4.H19 U4.J2 U4.J8 U4.J10 U4.J12 U4.K5 U4.K7 U4.K10 U4.K11 U4.K13 U4.K15 U4.L8 U4.L9 U4.L12 U4.L18 U4.M1 U4.M7 U4.M9 U4.M10 U4.M11 U4.M13 U4.N4 U4.N8 U4.N10 U4.N12 U4.N14 U4.P7 U4.P9 U4.P11 U4.P13 U4.P17 U4.R8 U4.R12 U4.R20 U4.T3 U4.T7 U4.T13 U4.U6 U4.U16 U4.V9 U4.V19 U4.W2 U4.W12 U4.Y5 U4.Y15 U5.1 U5.3 U5.4 U5.5 U5.7 U5.9 U5.11 U5.15 U5.18 U5.20 U5.21 U5.25 U6.3 U6.9 U7.3 U7.9 U8.3 U8.9 U9.3 U9.9 U11.3 U11.9 Y1.2 Y2.2 | length 80.5
  Top Layer w0.191: U4.V9@64.187,106.324 U4.V9@64.187,106.33 ; C8.1@75.082,103.472 75.089,103.478 v1(75.089,104.49) U1.A12@75.095,104.496
  Top Layer w0.203: v1(47.603,103.819) pwr-1.1@47.917,103.505 ; v1@77.484,103.712 v1(77.485,103.713)
  Top Layer w0.254: v1(48.45,106.032) 48.45,107.544 v1(48.73,107.824) ; C49.2@49.259,122.263 v1(49.263,122.259) 49.263,121.429 v1(49.267,121.425) ; C30.1@49.263,104.143 v1(49.32,104.086) v2(50.559,104.086) 50.56,104.088 50.56,104.913 R94.1@50.562,104.915 ; v2(56.578,102.235) 56.498,102.154 v2(56.498,100.47) 56.925,100.042 U2.10@59.269,100.042 ; v2(57.282,125.602) C148.1@58.106,125.603 ; v1(61.986,124.014) 62.03,123.969 62.03,123.006 R34.1@62.074,122.961 ; R82.1@63.74,125.215 63.805,125.28 64.374,125.28 64.411,125.316 64.461,125.316 64.634,125.489 v1(64.634,125.539) ; v2(66.726,103.512) 66.779,103.512 66.818,103.551 R87.1@67.246,103.551 ; R64.1@68.054,123.019 68.504,123.019 v1(68.504,123.939) ; R64.1@68.084,122.805 68.09,122.796 68.702,122.796 R63.1@68.715,122.809 ; Y2.2@68.715,123.939 68.715,124.024 68.652,124.087 R8.1@69.456,124.087
  Top Layer w0.305: U4.W2@58.587,105.53 U4.W2@58.587,105.524 58.994,105.117 v1(58.994,105.111) ; v1(60.58,105.137) 60.58,105.131 U4.Y5@60.987,104.724 U4.Y5@60.987,104.718 ; v1(63.78,106.743) 63.78,106.737 U4.V9@64.187,106.33 ; U1.B12@75.095,105.296 v1(75.095,106.096) ; U1.D12@75.095,106.896 v1(75.095,106.096) ; U5.25@76.148,120.328 ccw(c76.148,120.407) v1(76.204,120.351) ; U5.25@76.198,120.828 v1(76.205,120.835) ; U5.25@76.352,121.696 cw(c76.352,121.47) U5.25@76.511,121.63 ; U5.25@76.631,122.259 U5.25@76.646,122.244 ; U5.25@76.646,121.765 76.646,120.801 U5.25@76.869,120.578 ; U5.25@76.65,121.765 v1(76.65,122.244) ; v1(77.568,120.832) U5.25@77.572,120.828 ; v1(79.095,106.096) v1(78.295,106.096) v1(77.495,106.096) v1(76.695,106.096) v1(75.895,106.096) v1(75.095,106.096)
  Top Layer w0.356: C88.1@47.244,123.506 C88.1@47.351,123.613 ; v2(47.244,123.736) 47.424,123.736 47.466,123.778 47.516,123.778 47.769,124.031 U9.3@48.273,124.031 ; C44.2@47.362,121.425 47.351,121.435 47.351,122.251 v2(47.34,122.261) 47.366,122.287 47.366,123.597 C88.1@47.351,123.613 ; C88.1@47.376,123.688 47.376,123.638 C88.1@47.351,123.613 ; U9.3@48.274,124.051 48.998,124.051 U9.9@49.323,124.376 ; U9.9@49.444,124.255 49.577,124.388 U9.9@49.577,124.493 ; U6.3@51.456,102.144 52.181,102.144 v3(52.506,102.469) ; C56.2@52.269,121.932 52.269,122.078 v1(52.284,122.093) ; C56.2@52.269,122.093 52.273,122.093 52.284,122.104 52.284,123.41 52.283,123.411 v2(52.283,123.419) ; U11.3@53.264,124.041 53.989,124.041 v3(54.314,124.366) ; v2(60.958,120.647) 60.958,120.621 60.995,120.583 60.995,119.933 U4.A5@60.987,119.924 ; U4.E6@61.787,116.724 v1(61.787,117.524) ; U4.D8@63.387,117.524 v1(64.187,118.324) ; U4.B8@63.387,119.124 63.395,119.133 63.395,119.164 63.401,119.17 63.401,119.898 63.387,119.912 v1(63.387,119.924) ; U4.Y15@68.987,104.724 68.987,104.736 U4.Y15@69.009,104.758 ; U4.Y15@69.009,104.759 69.359,105.109 69.359,105.122 v1(69.367,105.131) ; U4.V19@72.187,106.324 72.566,105.945 72.58,105.945 v1(72.589,105.936) ; R15.2@72.898,101.498 72.957,101.498 R15.2@72.97,101.511 ; v3(77.965,101.295) 78.29,101.62 U8.3@79.015,101.62 79.038,101.642 79.398,101.642 79.762,102.006 79.762,102.041 79.884,102.163 C21.2@79.934,102.163 C21.2@79.942,102.171 ; v2(79.985,102.171) C21.2@79.942,102.171 ; R12.2@80.848,102.176 80.842,102.17 79.943,102.17 C21.2@79.942,102.171 ; v3(82.851,101.321) 83.176,101.646 U7.3@83.901,101.646
  Bottom Layer w0.152: v1(55.131,111.024) R77.1@55.131,111.856 ; C59.2@67.631,118.044 67.675,118.066 C59.2@67.695,118.077
  Bottom Layer w0.191: C106.2@62.376,110.913 v1(62.587,111.124) 62.593,111.118 62.846,111.118 C83.2@62.852,111.112 ; C100.1@77.965,99.682 v3(77.965,100.545) ; C31.1@82.813,99.441 82.851,99.478 v3(82.851,100.571) ; v1(83.095,112.496) 83.095,113.129 83.25,113.284 R6.1@83.266,113.284
  Bottom Layer w0.203: v1(60.987,112.724) v1@60.987,112.777 ; v1(62.587,115.924) 62.687,116.024 C71.2@62.687,116.294 ; v1(66.587,115.124) C66.2@66.587,115.177 ; v1@69.781,115.118 v1(69.787,115.124) ; R4.2@81.508,106.79 81.556,106.742 81.659,106.742 82.162,106.238 82.248,106.238 82.321,106.165 82.974,106.165 83.042,106.096 v1(83.095,106.096)
  Bottom Layer w0.254: C134.2@47.902,109.291 47.929,109.295 v1(48.73,109.424) ; C45.2@48.13,107.366 48.303,107.498 v1(48.73,107.824) ; v1(60.187,118.324) 60.198,118.313 C143.2@60.854,118.313 ; R22.2@62.337,114.324 v1(62.587,114.324) ; J1.12@63.728,103.077 63.728,103.399 J1.12@63.727,103.476 ; v1@64.187,111.925 C73.2@64.757,111.925 ; C85.2@64.427,112.725 v1(64.987,112.724) ; C34.2@65.039,104.221 65.158,104.102 65.158,103.77 v1(65.186,103.743) 65.186,103.703 65.228,103.661 J1.9@65.228,103.077 ; v1(66.587,105.524) C158.2@67.183,105.778 ; v1@67.402,107.94 R95.1@68.191,107.94 ; C159.2@70.025,109.243 v1(70.587,109.524) ; C41.2@71.662,113.525 71.662,113.571 71.664,113.573 71.71,113.573 72.167,114.031 72.167,114.304 v1(72.187,114.324) ; v1(72.589,105.936) 72.617,105.908 72.765,105.908 72.95,105.723 C157.2@72.996,105.723 ; SD1.6@77.086,125.09 77.157,125.02 77.157,124.016 77.28,123.893 v1(77.28,123.854)
  Bottom Layer w0.305: C59.2@67.695,118.077 v1(68.187,118.324) C60.2@68.864,118.375 ; C17.1@79.772,103.848 79.772,104.373 v1(79.895,104.496) ; C7.1@81.593,108.409 C120.2@82.234,108.409 ; C120.2@82.247,108.422 v1(82.296,108.471)
  Bottom Layer w0.356: C52.2@47.981,118.944 48.061,119.024 v1(48.73,119.024) ; v2(52.283,123.419) 52.301,123.401 52.695,123.401 53.01,123.086 C141.1@53.01,123.036 ; C6.2@53.53,116.692 53.599,116.624 v1(54.33,116.624) ; J2.MP1@56.414,123.944 J2.MP2@56.414,122.502 56.414,122.334 J2.MP2@56.586,122.161 ; v2(57.282,123.811) 57.256,123.811 57.124,123.944 56.446,123.944 56.446,124.755 J2.MP1@56.334,124.867 56.334,125.08 56.856,125.602 v2(57.282,125.602) ; C5.1@57.783,119.951 57.787,119.948 v1(57.787,119.124) ; v1(60.722,103.648) 60.728,103.642 J1.18@60.728,103.077 60.734,103.07 v1(60.734,103.052) ; v2(60.958,120.647) 60.965,120.647 C55.2@60.973,120.655 ; v1@61.774,117.537 61.787,117.55 v1(61.787,117.524) ; R27.1@61.798,115.832 62.483,115.832 62.575,115.924 v1(62.587,115.924) 62.587,115.912 62.919,115.58 C16.2@62.919,115.569 ; v1(62.232,102.688) 62.228,102.692 J1.15@62.228,103.077 62.231,103.08 62.231,103.53 v1(62.234,103.533) ; J2.8@62.934,122.047 62.934,120.377 v1(63.387,119.924) ; v1(63.78,106.743) C29.2@64.292,106.731 ; v1(64.187,118.324) v1@64.195,118.316 ; J2.MP6@72.034,124.867 72.069,124.902 SD1.12@73.564,124.902 ; C7.1@81.412,108.212 C7.1@81.496,108.296
  other v1: 50.508,99.53 64.005,100.127 63.738,102.461 85.281,102.972 47.603,103.235 73.982,103.276 74.879,103.294 63.727,103.476 76.689,103.713 78.296,103.713 47.587,104.394 80.695,104.496 81.495,104.496 83.095,104.496 83.895,104.496 83.095,105.296 83.895,105.296 51.554,106.045 53.861,106.045 55.274,106.045 83.895,106.096 83.895,106.896 61.787,107.124 69.787,107.124 83.895,107.697 55.131,107.824 59.387,107.924 62.587,107.924 67.387,107.924 75.895,108.496 77.495,108.496 79.095,108.496 83.895,108.496 63.387,108.724 66.587,108.724 72.987,108.724 51.695,109.097 75.095,109.296 76.695,109.296 83.896,109.296 55.13,109.424 62.587,109.524 64.187,109.524 65.787,109.524 67.387,109.524 76.695,110.096 77.495,110.096 79.095,110.096 79.895,110.096 80.695,110.096 82.295,110.096 83.095,110.096 83.895,110.096 60.187,110.324 63.387,110.324 64.987,110.324 66.587,110.324 68.187,110.324 83.095,110.896 83.895,110.896 48.73,111.024 57.787,111.124 64.187,111.124 64.986,111.125 65.787,111.124 67.387,111.124 75.095,111.696 83.095,111.696 83.895,111.696 63.387,111.924 64.187,111.924 66.587,111.924 71.387,111.924 75.095,112.496 75.895,112.496 76.695,112.496 77.495,112.496 78.295,112.496 79.095,112.496 82.295,112.496 83.895,112.496 62.587,112.724 65.787,112.724 67.387,112.724 68.987,112.724 84.54,112.837 79.895,113.296 80.695,113.296 81.495,113.296 49.531,113.424 51.688,113.43 54.331,113.424 58.587,113.524 63.387,113.524 64.987,113.524 66.587,113.524 84.521,113.612 82.483,113.995 47.918,114.211 64.187,114.324 65.787,114.324 67.387,114.324 81.64,114.351 84.43,114.371 82.525,114.732 48.73,115.024 54.33,115.024 55.13,115.024 64.987,115.124 79.553,115.278 77.724,115.316 85.039,115.303 81.953,115.43 76.111,115.456 83.433,115.487 75.336,115.532 55.13,115.824 59.387,115.924 77.277,116.013 78.689,116.078 80.162,116.078 82.59,116.141 83.439,116.129 84.39,116.141 81.712,116.256 80.988,116.395 85.407,116.434 48.73,116.624 49.531,116.624 64.987,116.724 72.987,116.724 77.789,116.713 78.689,116.713 79.589,116.713 74.727,116.751 76.873,116.726 83.45,116.84 76.124,117.323 81.75,117.348 78.664,117.399 80.15,117.411 48.731,117.424 54.33,117.424 83.883,117.475 85.357,117.496 60.987,117.524 70.587,117.524 74.008,117.758 83.033,117.754 84.328,117.996 76.119,118.153 77.192,118.151 78.524,118.173 77.898,118.181 79.286,118.186 74.114,118.302 80.721,118.351 78.376,118.766 73.977,118.834 83.287,118.859 85.382,118.859 76.202,118.925 76.656,118.928 77.11,118.914 77.565,118.923 81.318,118.961 50.33,119.024 55.13,119.024 65.787,119.124 80.328,119.202 76.192,119.412 76.647,119.415 77.101,119.401 77.555,119.409 73.85,119.558 55.13,119.824 77.113,119.871 76.205,119.882 76.659,119.885 77.568,119.879 71.387,119.924 83.036,119.906 83.85,119.921 84.731,119.919 85.587,119.921 80.061,120.142 80.806,120.142 81.551,120.142 82.296,120.142 76.658,120.354 77.112,120.34 77.567,120.348 75.489,120.561 74.804,120.617 76.659,120.837 77.113,120.823 78.529,120.834 80.061,120.942 80.81,120.942 81.559,120.942 82.309,120.942 77.113,121.293 76.205,121.305 76.659,121.307 77.568,121.302 79.396,121.487 78.974,121.703 77.101,121.75 76.192,121.762 76.647,121.765 77.555,121.759 75.44,121.826 78.517,121.834 74.803,121.89 58.568,121.925 77.104,122.23 76.196,122.242 77.559,122.239 73.774,122.471 74.625,122.58 79.234,122.896 78.321,122.999 75.438,123.012 76.619,123.126 80.099,123.19 80.848,123.19 81.597,123.19 82.256,123.19 75.806,123.66 79.223,123.876 76.572,123.985 80.112,123.99 80.857,123.99 81.602,123.99 82.297,123.993 85.788,124.117 83.315,124.131 84.099,124.13 84.888,124.119 73.736,125.282
  other v2: 85.115,99.047 55.31,100.203 50.503,100.216 72.326,100.673 50.559,101.311 70.383,101.651 58.801,103.314 55.419,103.403 72.149,104.089 75.764,114.389 70.98,121.653 57.896,122.16 84.887,124.752 52.288,125.293 72.034,125.311
  other v3: 52.506,101.719 77.965,102.045 82.851,102.071 52.506,103.219 54.314,123.616 49.326,123.908 54.314,125.116
  other v4: 59.769,101.192 61.269,101.192
LNA_EN: R68.1 U4.A19 | length 0.8
  Bottom Layer w0.152: R68.1@71.606,120.503 71.631,120.478 71.633,120.478 v2(72.187,119.924)
MIO_1: D6.2 U4.A7 | length 1.9
  Top Layer w0.152: D6.2@62.237,121.719 62.587,121.369 U4.A7@62.587,119.924
MIO_15: J2.11 U4.C8 | length 6.8
  SIGNAL w0.127: v1(63.386,122.974) 63.386,120.469 63.788,120.066 63.788,118.726 v1(63.387,118.324)
  Bottom Layer w0.127: v1(63.386,122.974) 64.198,122.974 64.434,122.739 J2.11@64.434,122.047
MIO_34: J2.14 U4.A12 | length 4.2
  Top Layer w0.127: v2(66.147,122.972) 66.161,122.959 66.161,121.008 66.587,120.582 U4.A12@66.587,119.924
  Bottom Layer w0.127: J2.14@65.934,122.047 65.995,122.109 65.995,122.508 65.995,122.736 66.147,122.888 v2(66.147,122.972)
MIO_46: D2.2 U4.D16 | length 5.1
  Top Layer w0.152: D2.2@68.11,121.742 68.434,121.419 68.67,121.419 68.965,121.123 68.965,120.586 69.393,120.157 69.393,117.918 U4.D16@69.787,117.524
MIO_48: J2.13 U4.B12 | length 3.4
  Bottom Layer w0.127: J2.13@65.434,122.047 65.492,121.988 65.492,121.515 66.587,120.421 v2(66.587,119.124)
MIO_49: D3.2 U4.C12 | length 4.3
  Top Layer w0.127: D3.2@65.331,121.727 65.393,121.665 65.393,118.951 65.597,118.747 66.165,118.747 U4.C12@66.587,118.324
MIO_53: J2.12 U4.C11 | length 4.5
  Bottom Layer w0.127: J2.12@64.934,122.126 64.979,122.081 64.979,121.502 66.195,120.285 66.195,118.732 v2(65.787,118.324)
mio_uart1_rx: J2.9 U4.A10 | length 2.8
  Bottom Layer w0.152: J2.9@63.434,122.047 63.482,121.998 63.482,121.53 64.93,120.082 64.93,119.981 v2(64.987,119.924)
mio_uart1_tx: J2.10 U4.A11 | length 3.1
  Bottom Layer w0.152: J2.10@63.934,122.047 63.983,121.998 63.983,121.504 64.608,120.879 64.922,120.879 65.664,120.137 65.664,120.128 65.787,120.005 v2(65.787,119.924)
MIPI_CLK0_LP_N: R88.2 U2.12 | length 8.3
  Top Layer w0.127: U2.12@60.269,100.042 60.27,100.041 60.27,99.467 v1(60.314,99.424) ; R88.2@66.256,101.668 66.256,100.398 v1(66.295,100.359)
  POWER w0.127: v1(60.314,99.424) 65.36,99.424 v1(66.295,100.359)
MIPI_CLK0_LP_P: R86.2 U2.11 | length 8.4
  Top Layer w0.127: v1(59.736,99.429) 59.766,99.459 59.766,100.039 U2.11@59.769,100.042 ; R86.2@65.691,101.677 65.691,100.387 v1(65.71,100.368)
  POWER w0.127: v1(59.736,99.429) 60.16,99.854 60.503,99.854 60.636,99.72 65.062,99.72 v1(65.71,100.368)
MIPI_CLK0_N: J1.7 R72.2 R88.1 U4.U19 | length 11.7
  Bottom Layer w0.123: v1(66.256,102.218) 66.23,102.243 66.23,103.074 J1.7@66.228,103.077 66.228,103.402 66.116,103.514 66.116,104.779 66.138,104.802 66.188,104.852 67.077,104.852 cw(c67.077,104.663) 67.265,104.663 67.265,104.357 ccw(c67.729,104.357) 67.729,103.893 ccw(c67.729,104.357) 68.193,104.357 68.193,104.634 cw(c68.613,104.634) 68.317,104.931 68.418,105.033 69.531,106.145 71.486,106.145 71.92,106.579 71.92,106.939 72.016,107.035 72.077,107.035 R72.2@72.167,107.124 ; R72.2@71.989,107.124 v1(72.187,107.124) 72.187,107.056 R72.2@72.131,106.999 ; R72.2@72.055,107.124 72.113,107.067 R72.2@72.113,106.999
MIPI_CLK0_P: J1.8 R72.1 R86.1 U4.U18 | length 11.3
  Bottom Layer w0.123: v1(65.691,102.227) 65.728,102.264 65.728,103.402 65.84,103.514 65.84,104.894 66.074,105.127 66.138,105.127 67.077,105.127 cw(c67.077,104.663) 67.541,104.663 67.541,104.357 ccw(c67.729,104.357) 67.729,104.168 ccw(c67.729,104.357) 67.918,104.357 67.918,104.634 cw(c68.613,104.634) 68.122,105.126 68.351,105.355 69.417,106.42 71.372,106.42 71.645,106.693 71.645,106.939 71.572,107.011 71.569,107.011 71.534,107.046 71.534,107.065 71.475,107.124 v1(71.387,107.124)
MIPI_D0_LP_N: R83.1 U2.14 | length 5.7
  Top Layer w0.127: U2.14@61.269,100.042 61.284,100.027 61.284,99.652 61.359,99.577 64.295,99.577 64.507,99.79 64.507,100.861 64.31,101.059 64.31,101.547 64.251,101.607 R83.1@64.198,101.609
MIPI_D0_LP_P: R80.1 U2.13 | length 6.6
  Top Layer w0.127: U2.13@60.769,100.042 60.769,99.565 60.998,99.336 64.395,99.336 64.77,99.711 R80.1@64.77,101.609
MIPI_D0_N: J1.11 R81.2 R83.2 U4.W19 | length 11.6
  SIGNAL w0.123: v1(64.198,102.159) 64.198,102.071 64.346,101.923 64.346,101.635 64.632,101.35 68.542,101.35 71.925,104.733 71.925,105.262 v1(72.187,105.524)
  Bottom Layer w0.123: v1(64.198,102.159) 64.198,102.247 64.36,102.409 64.36,102.619 64.228,102.752 J1.11@64.228,103.077